# Altium PCB layout.PcbDoc (part 7 of 11)
Units mil, origin at the board's own origin, x right, y up, seen from the top; angles counter-clockwise.
Board outline 3543.31 x 3149.61 mil, 2 copper layers (Top Layer, Bottom Layer); 78 components, 73 nets, 327 pads, 143 vias.
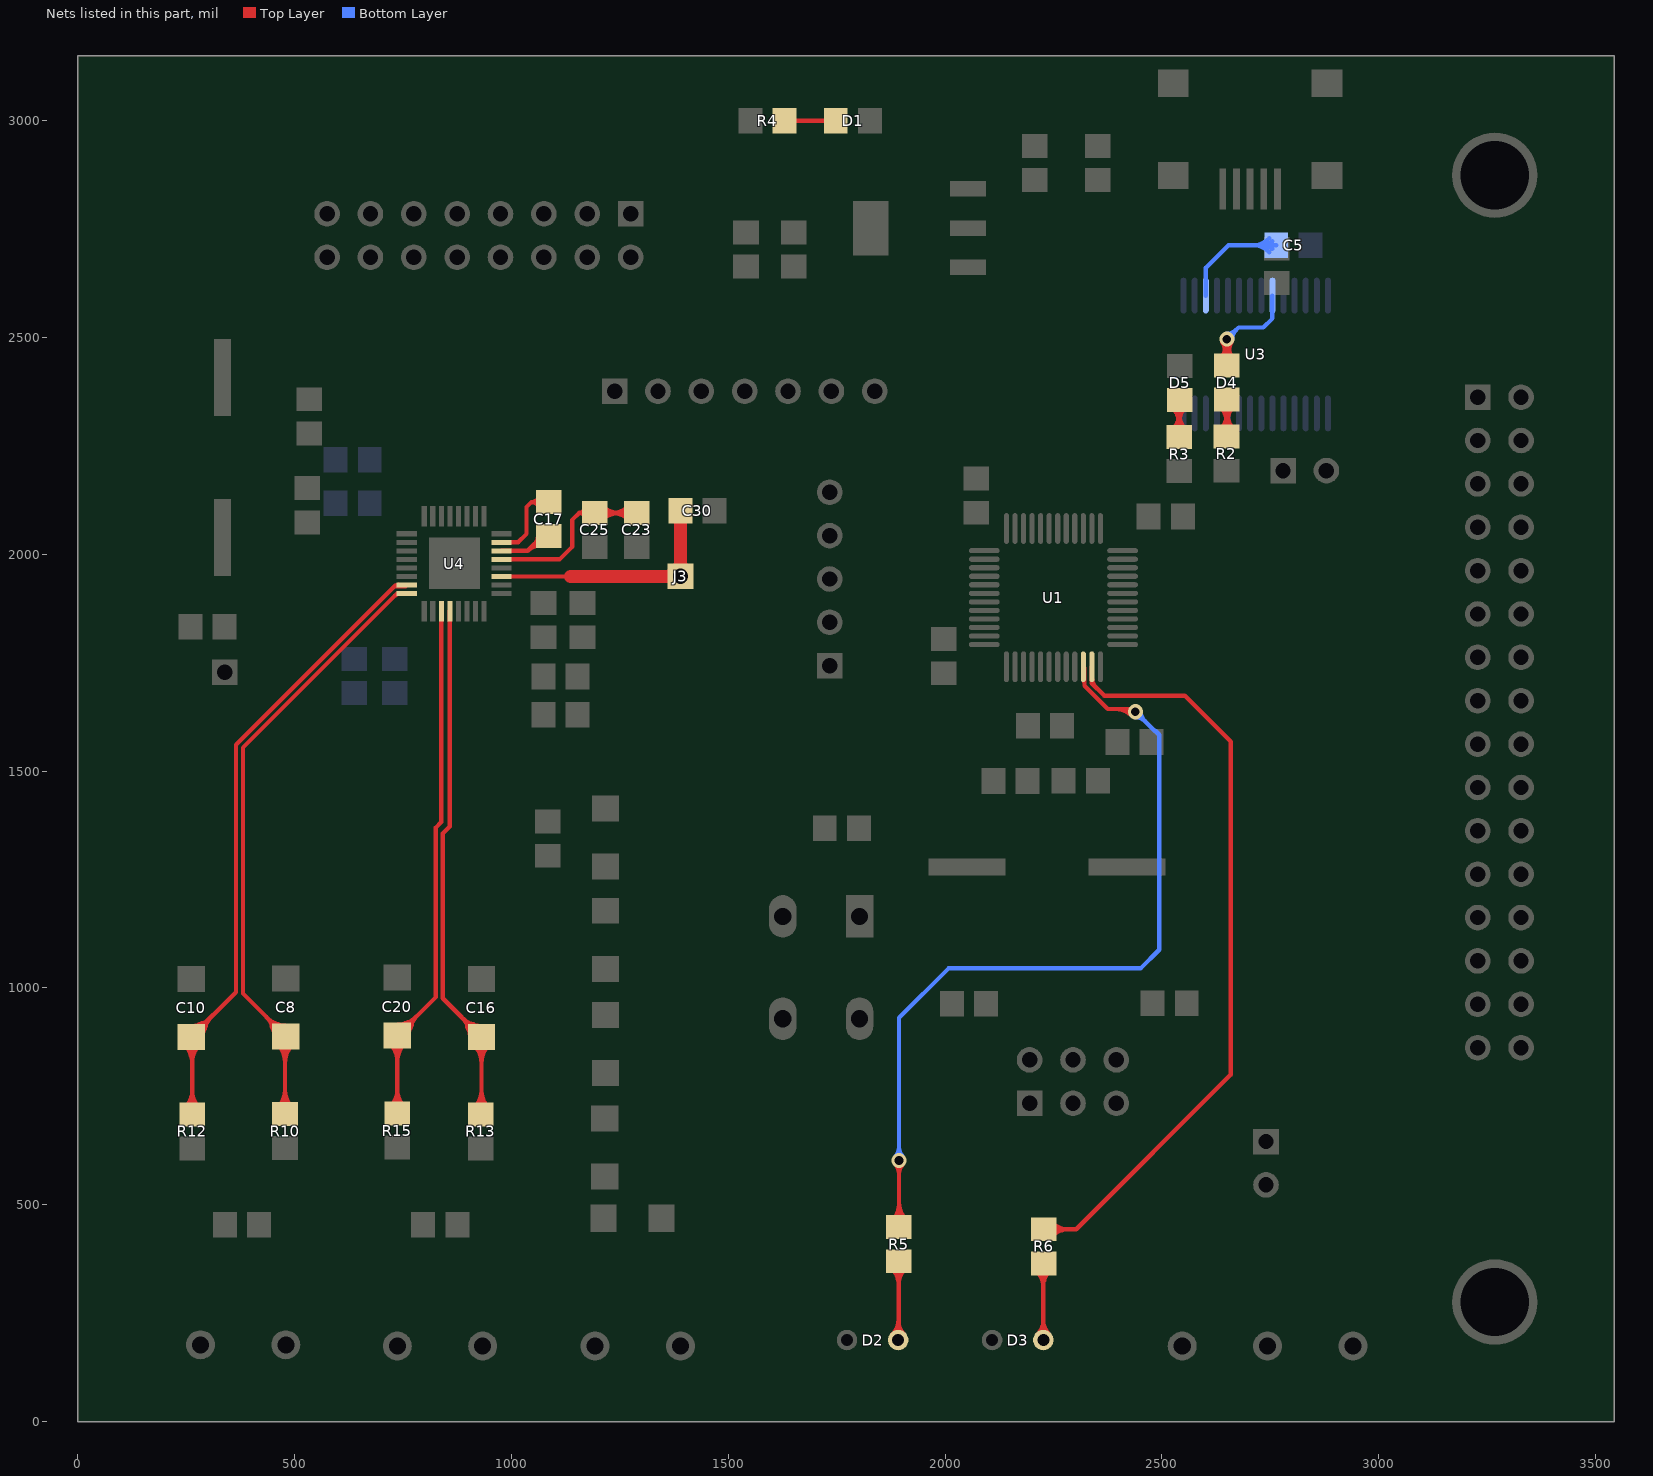
[diagram p7: the nets of this part, all layers, seen from the top]

## Via types
v1: diameter 35, hole 20, Top Layer to Bottom Layer, tented both sides, 113 vias
v2: diameter 35, hole 20, Top Layer to Bottom Layer, 28 vias
v3: diameter 35.43, hole 35.43, Top Layer to Bottom Layer, 2 vias

## Nets (pads, with @x,y where several pads share a name; then routed paths per layer and width w, separated by ;. In a path a pad name is that pad's centre, name@x,y a point inside that pad or via, vN(x,y) a via of type N, cw(c..) or ccw(c..) an arc to the next point about the centre after c; other vN are vias at no path point) (continued)
IAN: C10.2 R12.2 U4.7 | length 4592.9
  Top Layer w10: R12.2@264,708.37 264,885.14 C10.2@262,887.14 365,990.14 365,1560.78 730.55,1926.32 ; U4.7@758.72,1929.1 755.95,1926.32 730.55,1926.32 ; C10.2@245.95,869.52 cw(c202.38,825.95) 264,825.95 ; C10.2@245.95,869.52 cw(c202.38,825.95) 264,825.95 ; C10.2@245.95,869.52 cw(c202.38,825.95) 264,825.95 ; C10.2@245.95,869.52 cw(c202.38,825.95) 264,825.95 ; C10.2@245.95,869.52 cw(c202.38,825.95) 264,825.95 ; R12.2@248.05,724.32 ccw(c209.54,762.83) 264,762.83 ; R12.2@248.05,724.32 ccw(c209.54,762.83) 264,762.83 ; R12.2@248.05,724.32 ccw(c209.54,762.83) 264,762.83 ; R12.2@248.05,724.32 ccw(c209.54,762.83) 264,762.83 ; R12.2@248.05,724.32 ccw(c209.54,762.83) 264,762.83 ; C10.2@253.02,876.59 cw(c226.53,850.09) 264,850.09 ; C10.2@253.02,876.59 cw(c226.53,850.09) 264,850.09 ; C10.2@253.02,876.59 cw(c226.53,850.09) 264,850.09 ; C10.2@253.02,876.59 cw(c226.53,850.09) 264,850.09 ; C10.2@253.02,876.59 cw(c226.53,850.09) 264,850.09 ; R12.2@255.12,717.25 ccw(c233.68,738.69) 264,738.69 ; R12.2@255.12,717.25 ccw(c233.68,738.69) 264,738.69 ; R12.2@255.12,717.25 ccw(c233.68,738.69) 264,738.69 ; R12.2@255.12,717.25 ccw(c233.68,738.69) 264,738.69 ; R12.2@255.12,717.25 ccw(c233.68,738.69) 264,738.69 ; C10.2@258.58,888.05 cw(c296.19,881.23) 286.3,918.15 ; C10.2@258.58,888.05 cw(c296.19,881.23) 286.3,918.15 ; C10.2@258.58,888.05 cw(c296.19,881.23) 286.3,918.15 ; C10.2@258.58,888.05 cw(c296.19,881.23) 286.3,918.15 ; C10.2@258.58,888.05 cw(c296.19,881.23) 286.3,918.15 ; C10.2@258.58,888.05 cw(c296.19,881.23) 286.3,918.15 ; C10.2@258.58,888.05 cw(c296.19,881.23) 286.3,918.15 ; C10.2@258.58,888.05 cw(c296.19,881.23) 286.3,918.15 ; C10.2@258.58,888.05 cw(c296.19,881.23) 286.3,918.15 ; C10.2@258.58,888.05 cw(c296.19,881.23) 286.3,918.15 ; C10.2@263.57,902.06 ccw(c263.57,934.28) C10.2@286.36,911.5 ; C10.2@263.57,902.06 ccw(c263.57,934.28) C10.2@286.36,911.5 ; C10.2@263.57,902.06 ccw(c263.57,934.28) C10.2@286.36,911.5 ; C10.2@263.57,902.06 ccw(c263.57,934.28) C10.2@286.36,911.5 ; C10.2@263.57,902.06 ccw(c263.57,934.28) C10.2@286.36,911.5 ; C10.2@263.57,912.06 ccw(c263.57,968.43) 303.43,928.57 ; C10.2@263.57,912.06 ccw(c263.57,968.43) 303.43,928.57 ; C10.2@263.57,912.06 ccw(c263.57,968.43) 303.43,928.57 ; C10.2@263.57,912.06 ccw(c263.57,968.43) 303.43,928.57 ; C10.2@263.57,912.06 ccw(c263.57,968.43) 303.43,928.57 ; 264,738.69 ccw(c294.32,738.69) R12.2@272.88,717.25 ; 264,738.69 ccw(c294.32,738.69) R12.2@272.88,717.25 ; 264,738.69 ccw(c294.32,738.69) R12.2@272.88,717.25 ; 264,738.69 ccw(c294.32,738.69) R12.2@272.88,717.25 ; 264,738.69 ccw(c294.32,738.69) R12.2@272.88,717.25 ; 264,762.83 ccw(c318.46,762.83) R12.2@279.95,724.32 ; 264,762.83 ccw(c318.46,762.83) R12.2@279.95,724.32 ; 264,762.83 ccw(c318.46,762.83) R12.2@279.95,724.32 ; 264,762.83 ccw(c318.46,762.83) R12.2@279.95,724.32 ; 264,762.83 ccw(c318.46,762.83) R12.2@279.95,724.32 ; 264,828 cw(c322.71,828) C10.2@281.2,869.52 ; 264,828 cw(c322.71,828) C10.2@281.2,869.52 ; 264,828 cw(c322.71,828) C10.2@281.2,869.52 ; 264,828 cw(c322.71,828) C10.2@281.2,869.52 ; 264,828 cw(c322.71,828) C10.2@281.2,869.52 ; 264,852.15 cw(c298.57,852.15) C10.2@274.13,876.59 ; 264,852.15 cw(c298.57,852.15) C10.2@274.13,876.59 ; 264,852.15 cw(c298.57,852.15) C10.2@274.13,876.59 ; 264,852.15 cw(c298.57,852.15) C10.2@274.13,876.59 ; 264,852.15 cw(c298.57,852.15) C10.2@274.13,876.59 ; C10.2@264.7,882.19 ccw(c255.67,921.87) 294.98,911.34 ; C10.2@264.7,882.19 ccw(c255.67,921.87) 294.98,911.34 ; C10.2@264.7,882.19 ccw(c255.67,921.87) 294.98,911.34 ; C10.2@264.7,882.19 ccw(c255.67,921.87) 294.98,911.34 ; C10.2@264.7,882.19 ccw(c255.67,921.87) 294.98,911.34 ; C10.2@264.7,882.19 ccw(c255.67,921.87) 294.98,911.34 ; C10.2@264.7,882.19 ccw(c255.67,921.87) 294.98,911.34 ; C10.2@264.7,882.19 ccw(c255.67,921.87) 294.98,911.34 ; C10.2@264.7,882.19 ccw(c255.67,921.87) 294.98,911.34 ; C10.2@264.7,882.19 ccw(c255.67,921.87) 294.98,911.34 ; C10.2@278.5,887.14 cw(c318.32,887.14) C10.2@290.16,915.3 ; C10.2@278.5,887.14 cw(c318.32,887.14) C10.2@290.16,915.3 ; C10.2@278.5,887.14 cw(c318.32,887.14) C10.2@290.16,915.3 ; C10.2@278.5,887.14 cw(c318.32,887.14) C10.2@290.16,915.3 ; C10.2@278.5,887.14 cw(c318.32,887.14) C10.2@290.16,915.3 ; C10.2@288.5,887.14 cw(c352.46,887.14) 307.23,932.37 ; C10.2@288.5,887.14 cw(c352.46,887.14) 307.23,932.37 ; C10.2@288.5,887.14 cw(c352.46,887.14) 307.23,932.37 ; C10.2@288.5,887.14 cw(c352.46,887.14) 307.23,932.37 ; C10.2@288.5,887.14 cw(c352.46,887.14) 307.23,932.37 ; 730.55,1926.32 cw(c737.04,1919.83) U4.7@740.65,1928.27 ; 730.55,1926.32 cw(c737.04,1919.83) U4.7@740.65,1928.27 ; 730.55,1926.32 cw(c737.04,1919.83) U4.7@740.65,1928.27 ; 730.55,1926.32 cw(c737.04,1919.83) U4.7@740.65,1928.27 ; 730.55,1926.32 cw(c737.04,1919.83) U4.7@740.65,1928.27 ; 732.11,1926.32 ccw(c732.11,1938) U4.7@740.37,1929.74 ; 732.11,1926.32 ccw(c732.11,1938) U4.7@740.37,1929.74 ; 732.11,1926.32 ccw(c732.11,1938) U4.7@740.37,1929.74 ; 732.11,1926.32 ccw(c732.11,1938) U4.7@740.37,1929.74 ; 732.11,1926.32 ccw(c732.11,1938) U4.7@740.37,1929.74
IAP: C8.1 R10.2 U4.8 | length 4515.3
  Top Layer w10: R10.2@478,709.37 478,886 C8.1@480,888 381,987 381,1554.15 736.27,1909.42 U4.8@758.72,1909.42 ; 434.77,933.23 cw(c389.54,888) C8.1@453.5,888 ; 434.77,933.23 cw(c389.54,888) C8.1@453.5,888 ; 434.77,933.23 cw(c389.54,888) C8.1@453.5,888 ; 434.77,933.23 cw(c389.54,888) C8.1@453.5,888 ; 434.77,933.23 cw(c389.54,888) C8.1@453.5,888 ; 438.57,929.43 ccw(c478.43,969.28) C8.1@478.43,912.92 ; 438.57,929.43 ccw(c478.43,969.28) C8.1@478.43,912.92 ; 438.57,929.43 ccw(c478.43,969.28) C8.1@478.43,912.92 ; 438.57,929.43 ccw(c478.43,969.28) C8.1@478.43,912.92 ; 438.57,929.43 ccw(c478.43,969.28) C8.1@478.43,912.92 ; 447.02,912.2 ccw(c486.33,922.73) C8.1@477.3,883.05 ; 447.02,912.2 ccw(c486.33,922.73) C8.1@477.3,883.05 ; 447.02,912.2 ccw(c486.33,922.73) C8.1@477.3,883.05 ; 447.02,912.2 ccw(c486.33,922.73) C8.1@477.3,883.05 ; 447.02,912.2 ccw(c486.33,922.73) C8.1@477.3,883.05 ; 447.02,912.2 ccw(c486.33,922.73) C8.1@477.3,883.05 ; 447.02,912.2 ccw(c486.33,922.73) C8.1@477.3,883.05 ; 447.02,912.2 ccw(c486.33,922.73) C8.1@477.3,883.05 ; 447.02,912.2 ccw(c486.33,922.73) C8.1@477.3,883.05 ; 447.02,912.2 ccw(c486.33,922.73) C8.1@477.3,883.05 ; C8.1@451.84,916.16 cw(c423.68,888) C8.1@463.5,888 ; C8.1@451.84,916.16 cw(c423.68,888) C8.1@463.5,888 ; C8.1@451.84,916.16 cw(c423.68,888) C8.1@463.5,888 ; C8.1@451.84,916.16 cw(c423.68,888) C8.1@463.5,888 ; C8.1@451.84,916.16 cw(c423.68,888) C8.1@463.5,888 ; C8.1@455.64,912.36 ccw(c478.43,935.14) C8.1@478.43,902.92 ; C8.1@455.64,912.36 ccw(c478.43,935.14) C8.1@478.43,902.92 ; C8.1@455.64,912.36 ccw(c478.43,935.14) C8.1@478.43,902.92 ; C8.1@455.64,912.36 ccw(c478.43,935.14) C8.1@478.43,902.92 ; C8.1@455.64,912.36 ccw(c478.43,935.14) C8.1@478.43,902.92 ; 455.7,919.01 cw(c445.81,882.09) C8.1@483.42,888.91 ; 455.7,919.01 cw(c445.81,882.09) C8.1@483.42,888.91 ; 455.7,919.01 cw(c445.81,882.09) C8.1@483.42,888.91 ; 455.7,919.01 cw(c445.81,882.09) C8.1@483.42,888.91 ; 455.7,919.01 cw(c445.81,882.09) C8.1@483.42,888.91 ; 455.7,919.01 cw(c445.81,882.09) C8.1@483.42,888.91 ; 455.7,919.01 cw(c445.81,882.09) C8.1@483.42,888.91 ; 455.7,919.01 cw(c445.81,882.09) C8.1@483.42,888.91 ; 455.7,919.01 cw(c445.81,882.09) C8.1@483.42,888.91 ; 455.7,919.01 cw(c445.81,882.09) C8.1@483.42,888.91 ; C8.1@460.8,870.38 cw(c419.29,828.86) 478,828.86 ; C8.1@460.8,870.38 cw(c419.29,828.86) 478,828.86 ; C8.1@460.8,870.38 cw(c419.29,828.86) 478,828.86 ; C8.1@460.8,870.38 cw(c419.29,828.86) 478,828.86 ; C8.1@460.8,870.38 cw(c419.29,828.86) 478,828.86 ; R10.2@462.05,725.32 ccw(c423.54,763.83) 478,763.83 ; R10.2@462.05,725.32 ccw(c423.54,763.83) 478,763.83 ; R10.2@462.05,725.32 ccw(c423.54,763.83) 478,763.83 ; R10.2@462.05,725.32 ccw(c423.54,763.83) 478,763.83 ; R10.2@462.05,725.32 ccw(c423.54,763.83) 478,763.83 ; C8.1@467.87,877.45 cw(c443.43,853) 478,853 ; C8.1@467.87,877.45 cw(c443.43,853) 478,853 ; C8.1@467.87,877.45 cw(c443.43,853) 478,853 ; C8.1@467.87,877.45 cw(c443.43,853) 478,853 ; C8.1@467.87,877.45 cw(c443.43,853) 478,853 ; R10.2@469.12,718.25 ccw(c447.68,739.69) 478,739.69 ; R10.2@469.12,718.25 ccw(c447.68,739.69) 478,739.69 ; R10.2@469.12,718.25 ccw(c447.68,739.69) 478,739.69 ; R10.2@469.12,718.25 ccw(c447.68,739.69) 478,739.69 ; R10.2@469.12,718.25 ccw(c447.68,739.69) 478,739.69 ; 478,739.69 ccw(c508.32,739.69) R10.2@486.88,718.25 ; 478,739.69 ccw(c508.32,739.69) R10.2@486.88,718.25 ; 478,739.69 ccw(c508.32,739.69) R10.2@486.88,718.25 ; 478,739.69 ccw(c508.32,739.69) R10.2@486.88,718.25 ; 478,739.69 ccw(c508.32,739.69) R10.2@486.88,718.25 ; 478,763.83 ccw(c532.46,763.83) R10.2@493.95,725.32 ; 478,763.83 ccw(c532.46,763.83) R10.2@493.95,725.32 ; 478,763.83 ccw(c532.46,763.83) R10.2@493.95,725.32 ; 478,763.83 ccw(c532.46,763.83) R10.2@493.95,725.32 ; 478,763.83 ccw(c532.46,763.83) R10.2@493.95,725.32 ; 478,826.81 cw(c539.62,826.81) C8.1@496.05,870.38 ; 478,826.81 cw(c539.62,826.81) C8.1@496.05,870.38 ; 478,826.81 cw(c539.62,826.81) C8.1@496.05,870.38 ; 478,826.81 cw(c539.62,826.81) C8.1@496.05,870.38 ; 478,826.81 cw(c539.62,826.81) C8.1@496.05,870.38 ; 478,850.95 cw(c515.47,850.95) C8.1@488.98,877.45 ; 478,850.95 cw(c515.47,850.95) C8.1@488.98,877.45 ; 478,850.95 cw(c515.47,850.95) C8.1@488.98,877.45 ; 478,850.95 cw(c515.47,850.95) C8.1@488.98,877.45 ; 478,850.95 cw(c515.47,850.95) C8.1@488.98,877.45 ; 731.37,1904.52 cw(c741.01,1894.88) U4.8@741.01,1908.51 ; 731.37,1904.52 cw(c741.01,1894.88) U4.8@741.01,1908.51 ; 731.37,1904.52 cw(c741.01,1894.88) U4.8@741.01,1908.51 ; 731.37,1904.52 cw(c741.01,1894.88) U4.8@741.01,1908.51 ; 731.37,1904.52 cw(c741.01,1894.88) U4.8@741.01,1908.51
IBMS: C30.1 J3.1 U4.19 | length 1353.1
  Top Layer w10: U4.19@977.23,1948.79 1136,1948.79
  Top Layer w30: 1136,1948.79 1389.79,1948.79 J3.1@1390,1949 1390,2099.63 C30.1@1389.63,2100 ; 1354.42,1948.79 ccw(c1354.42,1984.58) J3.1@1379.73,1959.27 ; 1354.42,1948.79 ccw(c1354.42,1984.58) J3.1@1379.73,1959.27 ; 1354.42,1948.79 ccw(c1354.42,1984.58) J3.1@1379.73,1959.27 ; 1354.42,1948.79 ccw(c1354.42,1984.58) J3.1@1379.73,1959.27 ; 1354.42,1948.79 ccw(c1354.42,1984.58) J3.1@1379.73,1959.27 ; 1355.44,1948.79 cw(c1355.44,1914.44) J3.1@1379.73,1938.73 ; 1355.44,1948.79 cw(c1355.44,1914.44) J3.1@1379.73,1938.73 ; 1355.44,1948.79 cw(c1355.44,1914.44) J3.1@1379.73,1938.73 ; 1355.44,1948.79 cw(c1355.44,1914.44) J3.1@1379.73,1938.73 ; 1355.44,1948.79 cw(c1355.44,1914.44) J3.1@1379.73,1938.73 ; J3.1@1379.73,1959.27 ccw(c1354.93,1984.07) 1390,1984.07 ; J3.1@1379.73,1959.27 ccw(c1354.93,1984.07) 1390,1984.07 ; J3.1@1379.73,1959.27 ccw(c1354.93,1984.07) 1390,1984.07 ; J3.1@1379.73,1959.27 ccw(c1354.93,1984.07) 1390,1984.07 ; J3.1@1379.73,1959.27 ccw(c1354.93,1984.07) 1390,1984.07 ; C30.1@1380.75,2089.15 cw(c1358.42,2066.82) 1390,2066.82 ; C30.1@1380.75,2089.15 cw(c1358.42,2066.82) 1390,2066.82 ; C30.1@1380.75,2089.15 cw(c1358.42,2066.82) 1390,2066.82 ; C30.1@1380.75,2089.15 cw(c1358.42,2066.82) 1390,2066.82 ; C30.1@1380.75,2089.15 cw(c1358.42,2066.82) 1390,2066.82 ; 1390,1984.07 ccw(c1425.07,1984.07) J3.1@1400.27,1959.27 ; 1390,1984.07 ccw(c1425.07,1984.07) J3.1@1400.27,1959.27 ; 1390,1984.07 ccw(c1425.07,1984.07) J3.1@1400.27,1959.27 ; 1390,1984.07 ccw(c1425.07,1984.07) J3.1@1400.27,1959.27 ; 1390,1984.07 ccw(c1425.07,1984.07) J3.1@1400.27,1959.27 ; 1390,2068.6 cw(c1419.06,2068.6) C30.1@1398.51,2089.15 ; 1390,2068.6 cw(c1419.06,2068.6) C30.1@1398.51,2089.15 ; 1390,2068.6 cw(c1419.06,2068.6) C30.1@1398.51,2089.15 ; 1390,2068.6 cw(c1419.06,2068.6) C30.1@1398.51,2089.15 ; 1390,2068.6 cw(c1419.06,2068.6) C30.1@1398.51,2089.15
IBN: C20.2 R15.2 U4.11 | length 4251
  Top Layer w10: R15.2@737,710.37 C20.2@737,890.14 826,979.14 826,1370 838.45,1382.45 U4.11@838.45,1869.06 ; C20.2@719.38,872.52 cw(c676.83,829.98) 737,829.98 ; C20.2@719.38,872.52 cw(c676.83,829.98) 737,829.98 ; C20.2@719.38,872.52 cw(c676.83,829.98) 737,829.98 ; C20.2@719.38,872.52 cw(c676.83,829.98) 737,829.98 ; C20.2@719.38,872.52 cw(c676.83,829.98) 737,829.98 ; R15.2@721.05,726.32 ccw(c682.54,764.83) 737,764.83 ; R15.2@721.05,726.32 ccw(c682.54,764.83) 737,764.83 ; R15.2@721.05,726.32 ccw(c682.54,764.83) 737,764.83 ; R15.2@721.05,726.32 ccw(c682.54,764.83) 737,764.83 ; R15.2@721.05,726.32 ccw(c682.54,764.83) 737,764.83 ; C20.2@726.45,879.59 cw(c700.98,854.12) 737,854.12 ; C20.2@726.45,879.59 cw(c700.98,854.12) 737,854.12 ; C20.2@726.45,879.59 cw(c700.98,854.12) 737,854.12 ; C20.2@726.45,879.59 cw(c700.98,854.12) 737,854.12 ; C20.2@726.45,879.59 cw(c700.98,854.12) 737,854.12 ; R15.2@728.12,719.25 ccw(c706.68,740.69) 737,740.69 ; R15.2@728.12,719.25 ccw(c706.68,740.69) 737,740.69 ; R15.2@728.12,719.25 ccw(c706.68,740.69) 737,740.69 ; R15.2@728.12,719.25 ccw(c706.68,740.69) 737,740.69 ; R15.2@728.12,719.25 ccw(c706.68,740.69) 737,740.69 ; C20.2@733.58,891.05 cw(c771.19,884.23) 761.3,921.15 ; C20.2@733.58,891.05 cw(c771.19,884.23) 761.3,921.15 ; C20.2@733.58,891.05 cw(c771.19,884.23) 761.3,921.15 ; C20.2@733.58,891.05 cw(c771.19,884.23) 761.3,921.15 ; C20.2@733.58,891.05 cw(c771.19,884.23) 761.3,921.15 ; C20.2@733.58,891.05 cw(c771.19,884.23) 761.3,921.15 ; C20.2@733.58,891.05 cw(c771.19,884.23) 761.3,921.15 ; C20.2@733.58,891.05 cw(c771.19,884.23) 761.3,921.15 ; C20.2@733.58,891.05 cw(c771.19,884.23) 761.3,921.15 ; C20.2@733.58,891.05 cw(c771.19,884.23) 761.3,921.15 ; 737,740.69 ccw(c767.32,740.69) R15.2@745.88,719.25 ; 737,740.69 ccw(c767.32,740.69) R15.2@745.88,719.25 ; 737,740.69 ccw(c767.32,740.69) R15.2@745.88,719.25 ; 737,740.69 ccw(c767.32,740.69) R15.2@745.88,719.25 ; 737,740.69 ccw(c767.32,740.69) R15.2@745.88,719.25 ; 737,764.83 ccw(c791.46,764.83) R15.2@752.95,726.32 ; 737,764.83 ccw(c791.46,764.83) R15.2@752.95,726.32 ; 737,764.83 ccw(c791.46,764.83) R15.2@752.95,726.32 ; 737,764.83 ccw(c791.46,764.83) R15.2@752.95,726.32 ; 737,764.83 ccw(c791.46,764.83) R15.2@752.95,726.32 ; 737,829.98 cw(c797.17,829.98) C20.2@754.62,872.52 ; 737,829.98 cw(c797.17,829.98) C20.2@754.62,872.52 ; 737,829.98 cw(c797.17,829.98) C20.2@754.62,872.52 ; 737,829.98 cw(c797.17,829.98) C20.2@754.62,872.52 ; 737,829.98 cw(c797.17,829.98) C20.2@754.62,872.52 ; 737,854.12 cw(c773.02,854.12) C20.2@747.55,879.59 ; 737,854.12 cw(c773.02,854.12) C20.2@747.55,879.59 ; 737,854.12 cw(c773.02,854.12) C20.2@747.55,879.59 ; 737,854.12 cw(c773.02,854.12) C20.2@747.55,879.59 ; 737,854.12 cw(c773.02,854.12) C20.2@747.55,879.59 ; C20.2@738.57,905.06 ccw(c738.57,937.28) C20.2@761.36,914.5 ; C20.2@738.57,905.06 ccw(c738.57,937.28) C20.2@761.36,914.5 ; C20.2@738.57,905.06 ccw(c738.57,937.28) C20.2@761.36,914.5 ; C20.2@738.57,905.06 ccw(c738.57,937.28) C20.2@761.36,914.5 ; C20.2@738.57,905.06 ccw(c738.57,937.28) C20.2@761.36,914.5 ; C20.2@738.57,915.06 ccw(c738.57,971.43) 778.43,931.57 ; C20.2@738.57,915.06 ccw(c738.57,971.43) 778.43,931.57 ; C20.2@738.57,915.06 ccw(c738.57,971.43) 778.43,931.57 ; C20.2@738.57,915.06 ccw(c738.57,971.43) 778.43,931.57 ; C20.2@738.57,915.06 ccw(c738.57,971.43) 778.43,931.57 ; C20.2@739.7,885.19 ccw(c730.67,924.87) 769.98,914.34 ; C20.2@739.7,885.19 ccw(c730.67,924.87) 769.98,914.34 ; C20.2@739.7,885.19 ccw(c730.67,924.87) 769.98,914.34 ; C20.2@739.7,885.19 ccw(c730.67,924.87) 769.98,914.34 ; C20.2@739.7,885.19 ccw(c730.67,924.87) 769.98,914.34 ; C20.2@739.7,885.19 ccw(c730.67,924.87) 769.98,914.34 ; C20.2@739.7,885.19 ccw(c730.67,924.87) 769.98,914.34 ; C20.2@739.7,885.19 ccw(c730.67,924.87) 769.98,914.34 ; C20.2@739.7,885.19 ccw(c730.67,924.87) 769.98,914.34 ; C20.2@739.7,885.19 ccw(c730.67,924.87) 769.98,914.34 ; C20.2@753.5,890.14 cw(c793.32,890.14) C20.2@765.16,918.3 ; C20.2@753.5,890.14 cw(c793.32,890.14) C20.2@765.16,918.3 ; C20.2@753.5,890.14 cw(c793.32,890.14) C20.2@765.16,918.3 ; C20.2@753.5,890.14 cw(c793.32,890.14) C20.2@765.16,918.3 ; C20.2@753.5,890.14 cw(c793.32,890.14) C20.2@765.16,918.3 ; C20.2@763.5,890.14 cw(c827.46,890.14) 782.23,935.37 ; C20.2@763.5,890.14 cw(c827.46,890.14) 782.23,935.37 ; C20.2@763.5,890.14 cw(c827.46,890.14) 782.23,935.37 ; C20.2@763.5,890.14 cw(c827.46,890.14) 782.23,935.37 ; C20.2@763.5,890.14 cw(c827.46,890.14) 782.23,935.37
IBP: C16.1 R13.2 U4.12 | length 4255.3
  Top Layer w10: U4.12@858.13,1869.06 858.13,1372.13 842,1356 842,976 C16.1@931,887 931,710.37 R13.2@929,708.37 ; 885.77,932.23 cw(c840.54,887) C16.1@904.5,887 ; 885.77,932.23 cw(c840.54,887) C16.1@904.5,887 ; 885.77,932.23 cw(c840.54,887) C16.1@904.5,887 ; 885.77,932.23 cw(c840.54,887) C16.1@904.5,887 ; 885.77,932.23 cw(c840.54,887) C16.1@904.5,887 ; 889.57,928.43 ccw(c929.43,968.28) C16.1@929.43,911.92 ; 889.57,928.43 ccw(c929.43,968.28) C16.1@929.43,911.92 ; 889.57,928.43 ccw(c929.43,968.28) C16.1@929.43,911.92 ; 889.57,928.43 ccw(c929.43,968.28) C16.1@929.43,911.92 ; 889.57,928.43 ccw(c929.43,968.28) C16.1@929.43,911.92 ; 898.02,911.2 ccw(c937.33,921.73) C16.1@928.3,882.05 ; 898.02,911.2 ccw(c937.33,921.73) C16.1@928.3,882.05 ; 898.02,911.2 ccw(c937.33,921.73) C16.1@928.3,882.05 ; 898.02,911.2 ccw(c937.33,921.73) C16.1@928.3,882.05 ; 898.02,911.2 ccw(c937.33,921.73) C16.1@928.3,882.05 ; 898.02,911.2 ccw(c937.33,921.73) C16.1@928.3,882.05 ; 898.02,911.2 ccw(c937.33,921.73) C16.1@928.3,882.05 ; 898.02,911.2 ccw(c937.33,921.73) C16.1@928.3,882.05 ; 898.02,911.2 ccw(c937.33,921.73) C16.1@928.3,882.05 ; 898.02,911.2 ccw(c937.33,921.73) C16.1@928.3,882.05 ; C16.1@902.84,915.16 cw(c874.68,887) C16.1@914.5,887 ; C16.1@902.84,915.16 cw(c874.68,887) C16.1@914.5,887 ; C16.1@902.84,915.16 cw(c874.68,887) C16.1@914.5,887 ; C16.1@902.84,915.16 cw(c874.68,887) C16.1@914.5,887 ; C16.1@902.84,915.16 cw(c874.68,887) C16.1@914.5,887 ; C16.1@906.64,911.36 ccw(c929.43,934.14) C16.1@929.43,901.92 ; C16.1@906.64,911.36 ccw(c929.43,934.14) C16.1@929.43,901.92 ; C16.1@906.64,911.36 ccw(c929.43,934.14) C16.1@929.43,901.92 ; C16.1@906.64,911.36 ccw(c929.43,934.14) C16.1@929.43,901.92 ; C16.1@906.64,911.36 ccw(c929.43,934.14) C16.1@929.43,901.92 ; 906.7,918.01 cw(c896.81,881.09) C16.1@934.42,887.91 ; 906.7,918.01 cw(c896.81,881.09) C16.1@934.42,887.91 ; 906.7,918.01 cw(c896.81,881.09) C16.1@934.42,887.91 ; 906.7,918.01 cw(c896.81,881.09) C16.1@934.42,887.91 ; 906.7,918.01 cw(c896.81,881.09) C16.1@934.42,887.91 ; 906.7,918.01 cw(c896.81,881.09) C16.1@934.42,887.91 ; 906.7,918.01 cw(c896.81,881.09) C16.1@934.42,887.91 ; 906.7,918.01 cw(c896.81,881.09) C16.1@934.42,887.91 ; 906.7,918.01 cw(c896.81,881.09) C16.1@934.42,887.91 ; 906.7,918.01 cw(c896.81,881.09) C16.1@934.42,887.91 ; C16.1@913.38,869.38 cw(c870.83,826.83) 931,826.83 ; C16.1@913.38,869.38 cw(c870.83,826.83) 931,826.83 ; C16.1@913.38,869.38 cw(c870.83,826.83) 931,826.83 ; C16.1@913.38,869.38 cw(c870.83,826.83) 931,826.83 ; C16.1@913.38,869.38 cw(c870.83,826.83) 931,826.83 ; R13.2@915.02,724.32 ccw(c876.43,762.91) 931,762.91 ; R13.2@915.02,724.32 ccw(c876.43,762.91) 931,762.91 ; R13.2@915.02,724.32 ccw(c876.43,762.91) 931,762.91 ; R13.2@915.02,724.32 ccw(c876.43,762.91) 931,762.91 ; R13.2@915.02,724.32 ccw(c876.43,762.91) 931,762.91 ; C16.1@920.45,876.45 cw(c894.98,850.98) 931,850.98 ; C16.1@920.45,876.45 cw(c894.98,850.98) 931,850.98 ; C16.1@920.45,876.45 cw(c894.98,850.98) 931,850.98 ; C16.1@920.45,876.45 cw(c894.98,850.98) 931,850.98 ; C16.1@920.45,876.45 cw(c894.98,850.98) 931,850.98 ; R13.2@922.09,717.25 ccw(c900.57,738.77) 931,738.77 ; R13.2@922.09,717.25 ccw(c900.57,738.77) 931,738.77 ; R13.2@922.09,717.25 ccw(c900.57,738.77) 931,738.77 ; R13.2@922.09,717.25 ccw(c900.57,738.77) 931,738.77 ; R13.2@922.09,717.25 ccw(c900.57,738.77) 931,738.77 ; 931,738.61 ccw(c961.21,738.61) R13.2@939.85,717.25 ; 931,738.61 ccw(c961.21,738.61) R13.2@939.85,717.25 ; 931,738.61 ccw(c961.21,738.61) R13.2@939.85,717.25 ; 931,738.61 ccw(c961.21,738.61) R13.2@939.85,717.25 ; 931,738.61 ccw(c961.21,738.61) R13.2@939.85,717.25 ; 931,762.76 ccw(c985.35,762.76) R13.2@946.92,724.32 ; 931,762.76 ccw(c985.35,762.76) R13.2@946.92,724.32 ; 931,762.76 ccw(c985.35,762.76) R13.2@946.92,724.32 ; 931,762.76 ccw(c985.35,762.76) R13.2@946.92,724.32 ; 931,762.76 ccw(c985.35,762.76) R13.2@946.92,724.32 ; 931,826.83 cw(c991.17,826.83) C16.1@948.62,869.38 ; 931,826.83 cw(c991.17,826.83) C16.1@948.62,869.38 ; 931,826.83 cw(c991.17,826.83) C16.1@948.62,869.38 ; 931,826.83 cw(c991.17,826.83) C16.1@948.62,869.38 ; 931,826.83 cw(c991.17,826.83) C16.1@948.62,869.38 ; 931,850.98 cw(c967.02,850.98) C16.1@941.55,876.45 ; 931,850.98 cw(c967.02,850.98) C16.1@941.55,876.45 ; 931,850.98 cw(c967.02,850.98) C16.1@941.55,876.45 ; 931,850.98 cw(c967.02,850.98) C16.1@941.55,876.45 ; 931,850.98 cw(c967.02,850.98) C16.1@941.55,876.45
LED0: R5.1 U1.10 | length 3645.9
  Top Layer w10: R5.1@1893,448.37 1894,449.37 v2(1894,602) ; U1.10@2318.9,1740.55 2321.68,1737.77 2321.68,1696.7 2375.37,1643 2433,1643 v2(2439,1637) v2@2451,1637 ; R5.1@1879.02,464.32 ccw(c1842.84,500.49) 1894,500.49 ; R5.1@1879.02,464.32 ccw(c1842.84,500.49) 1894,500.49 ; R5.1@1879.02,464.32 ccw(c1842.84,500.49) 1894,500.49 ; R5.1@1879.02,464.32 ccw(c1842.84,500.49) 1894,500.49 ; R5.1@1879.02,464.32 ccw(c1842.84,500.49) 1894,500.49 ; v2@1885.16,593.16 cw(c1863.82,571.82) 1894,571.82 ; v2@1885.16,593.16 cw(c1863.82,571.82) 1894,571.82 ; v2@1885.16,593.16 cw(c1863.82,571.82) 1894,571.82 ; v2@1885.16,593.16 cw(c1863.82,571.82) 1894,571.82 ; v2@1885.16,593.16 cw(c1863.82,571.82) 1894,571.82 ; R5.1@1886.09,457.25 ccw(c1866.99,476.35) 1894,476.35 ; R5.1@1886.09,457.25 ccw(c1866.99,476.35) 1894,476.35 ; R5.1@1886.09,457.25 ccw(c1866.99,476.35) 1894,476.35 ; R5.1@1886.09,457.25 ccw(c1866.99,476.35) 1894,476.35 ; R5.1@1886.09,457.25 ccw(c1866.99,476.35) 1894,476.35 ; 1894,481.03 ccw(c1927.63,481.03) R5.1@1903.85,457.25 ; 1894,481.03 ccw(c1927.63,481.03) R5.1@1903.85,457.25 ; 1894,481.03 ccw(c1927.63,481.03) R5.1@1903.85,457.25 ; 1894,481.03 ccw(c1927.63,481.03) R5.1@1903.85,457.25 ; 1894,481.03 ccw(c1927.63,481.03) R5.1@1903.85,457.25 ; 1894,505.17 ccw(c1951.77,505.17) R5.1@1910.92,464.32 ; 1894,505.17 ccw(c1951.77,505.17) R5.1@1910.92,464.32 ; 1894,505.17 ccw(c1951.77,505.17) R5.1@1910.92,464.32 ; 1894,505.17 ccw(c1951.77,505.17) R5.1@1910.92,464.32 ; 1894,505.17 ccw(c1951.77,505.17) R5.1@1910.92,464.32 ; 1894,571.82 cw(c1924.18,571.82) v2@1902.84,593.16 ; 1894,571.82 cw(c1924.18,571.82) v2@1902.84,593.16 ; 1894,571.82 cw(c1924.18,571.82) v2@1902.84,593.16 ; 1894,571.82 cw(c1924.18,571.82) v2@1902.84,593.16 ; 1894,571.82 cw(c1924.18,571.82) v2@1902.84,593.16 ; U1.10@2318.26,1710.38 cw(c2310,1702.13) 2321.68,1702.13 ; U1.10@2318.26,1710.38 cw(c2310,1702.13) 2321.68,1702.13 ; U1.10@2318.26,1710.38 cw(c2310,1702.13) 2321.68,1702.13 ; U1.10@2318.26,1710.38 cw(c2310,1702.13) 2321.68,1702.13 ; U1.10@2318.26,1710.38 cw(c2310,1702.13) 2321.68,1702.13 ; 2394.34,1643 cw(c2394.34,1592.34) v2@2430.16,1628.16 ; 2394.34,1643 cw(c2394.34,1592.34) v2@2430.16,1628.16 ; 2394.34,1643 cw(c2394.34,1592.34) v2@2430.16,1628.16 ; 2394.34,1643 cw(c2394.34,1592.34) v2@2430.16,1628.16 ; 2394.34,1643 cw(c2394.34,1592.34) v2@2430.16,1628.16 ; 2418.48,1643 cw(c2418.48,1616.48) v2@2437.23,1635.23 ; 2418.48,1643 cw(c2418.48,1616.48) v2@2437.23,1635.23 ; 2418.48,1643 cw(c2418.48,1616.48) v2@2437.23,1635.23 ; 2418.48,1643 cw(c2418.48,1616.48) v2@2437.23,1635.23 ; 2418.48,1643 cw(c2418.48,1616.48) v2@2437.23,1635.23
  Bottom Layer w10: v2(1894,602) 1894,931 2008,1045 2451,1045 2494,1088 2494,1584 2485,1593 2483,1593 v2(2439,1637) ; v2@1885.16,610.84 ccw(c1863.82,632.18) 1894,632.18 ; v2@1885.16,610.84 ccw(c1863.82,632.18) 1894,632.18 ; v2@1885.16,610.84 ccw(c1863.82,632.18) 1894,632.18 ; v2@1885.16,610.84 ccw(c1863.82,632.18) 1894,632.18 ; v2@1885.16,610.84 ccw(c1863.82,632.18) 1894,632.18 ; 1894,632.18 ccw(c1924.18,632.18) v2@1902.84,610.84 ; 1894,632.18 ccw(c1924.18,632.18) v2@1902.84,610.84 ; 1894,632.18 ccw(c1924.18,632.18) v2@1902.84,610.84 ; 1894,632.18 ccw(c1924.18,632.18) v2@1902.84,610.84 ; 1894,632.18 ccw(c1924.18,632.18) v2@1902.84,610.84 ; v2@2439,1624.5 cw(c2439,1594.32) 2460.34,1615.66 ; v2@2439,1624.5 cw(c2439,1594.32) 2460.34,1615.66 ; v2@2439,1624.5 cw(c2439,1594.32) 2460.34,1615.66 ; v2@2439,1624.5 cw(c2439,1594.32) 2460.34,1615.66 ; v2@2439,1624.5 cw(c2439,1594.32) 2460.34,1615.66 ; v2@2451.5,1637 ccw(c2481.68,1637) 2460.34,1615.66 ; v2@2451.5,1637 ccw(c2481.68,1637) 2460.34,1615.66 ; v2@2451.5,1637 ccw(c2481.68,1637) 2460.34,1615.66 ; v2@2451.5,1637 ccw(c2481.68,1637) 2460.34,1615.66 ; v2@2451.5,1637 ccw(c2481.68,1637) 2460.34,1615.66
LED1: R6.1 U1.11 | length 2517
  Top Layer w10: R6.1@2228,443.37 2302.37,443.37 2659,800 2659,1568 2553,1674 2367,1674 2338.58,1702.42 U1.11@2338.58,1740.55 ; R6.1@2238.85,434.49 cw(c2260.29,413.05) 2260.29,443.37 ; R6.1@2238.85,434.49 cw(c2260.29,413.05) 2260.29,443.37 ; R6.1@2238.85,434.49 cw(c2260.29,413.05) 2260.29,443.37 ; R6.1@2238.85,434.49 cw(c2260.29,413.05) 2260.29,443.37 ; R6.1@2238.85,434.49 cw(c2260.29,413.05) 2260.29,443.37 ; R6.1@2238.85,452.25 ccw(c2260.29,473.69) 2260.29,443.37 ; R6.1@2238.85,452.25 ccw(c2260.29,473.69) 2260.29,443.37 ; R6.1@2238.85,452.25 ccw(c2260.29,473.69) 2260.29,443.37 ; R6.1@2238.85,452.25 ccw(c2260.29,473.69) 2260.29,443.37 ; R6.1@2238.85,452.25 ccw(c2260.29,473.69) 2260.29,443.37 ; R6.1@2245.92,427.42 cw(c2284.43,388.91) 2284.43,443.37 ; R6.1@2245.92,427.42 cw(c2284.43,388.91) 2284.43,443.37 ; R6.1@2245.92,427.42 cw(c2284.43,388.91) 2284.43,443.37 ; R6.1@2245.92,427.42 cw(c2284.43,388.91) 2284.43,443.37 ; R6.1@2245.92,427.42 cw(c2284.43,388.91) 2284.43,443.37 ; R6.1@2245.92,459.32 ccw(c2284.43,497.83) 2284.43,443.37 ; R6.1@2245.92,459.32 ccw(c2284.43,497.83) 2284.43,443.37 ; R6.1@2245.92,459.32 ccw(c2284.43,497.83) 2284.43,443.37 ; R6.1@2245.92,459.32 ccw(c2284.43,497.83) 2284.43,443.37 ; R6.1@2245.92,459.32 ccw(c2284.43,497.83) 2284.43,443.37 ; U1.11@2339.49,1711.02 ccw(c2362.45,1711.02) 2346.21,1694.79 ; U1.11@2339.49,1711.02 ccw(c2362.45,1711.02) 2346.21,1694.79 ; U1.11@2339.49,1711.02 ccw(c2362.45,1711.02) 2346.21,1694.79 ; U1.11@2339.49,1711.02 ccw(c2362.45,1711.02) 2346.21,1694.79 ; U1.11@2339.49,1711.02 ccw(c2362.45,1711.02) 2346.21,1694.79
MSH: C23.1 C25.1 U4.21 | length 1887.6
  Top Layer w10: U4.21@977.23,1988.16 1111.16,1988.16 1140,2017 1140,2079 1156.37,2095.37 ; C23.1@1289,2095.37 C25.1@1192,2095.37 1156.37,2095.37 ; 1156.37,2095.37 cw(c1156.37,2081.54) C25.1@1169.17,2086.8 ; 1156.37,2095.37 ccw(c1156.37,2109.2) C25.1@1169.17,2103.94 ; 1156.37,2095.37 cw(c1156.37,2081.54) C25.1@1169.17,2086.8 ; 1156.37,2095.37 ccw(c1156.37,2109.2) C25.1@1169.17,2103.94 ; 1156.37,2095.37 cw(c1156.37,2081.54) C25.1@1169.17,2086.8 ; 1156.37,2095.37 ccw(c1156.37,2109.2) C25.1@1169.17,2103.94 ; 1156.37,2095.37 cw(c1156.37,2081.54) C25.1@1169.17,2086.8 ; 1156.37,2095.37 ccw(c1156.37,2109.2) C25.1@1169.17,2103.94 ; 1156.37,2095.37 cw(c1156.37,2081.54) C25.1@1169.17,2086.8 ; 1156.37,2095.37 ccw(c1156.37,2109.2) C25.1@1169.17,2103.94 ; C25.1@1202.85,2086.49 cw(c1224.29,2065.05) 1224.29,2095.37 ; C25.1@1202.85,2086.49 cw(c1224.29,2065.05) 1224.29,2095.37 ; C25.1@1202.85,2086.49 cw(c1224.29,2065.05) 1224.29,2095.37 ; C25.1@1202.85,2086.49 cw(c1224.29,2065.05) 1224.29,2095.37 ; C25.1@1202.85,2086.49 cw(c1224.29,2065.05) 1224.29,2095.37 ; C25.1@1202.85,2104.25 ccw(c1224.29,2125.69) 1224.29,2095.37 ; C25.1@1202.85,2104.25 ccw(c1224.29,2125.69) 1224.29,2095.37 ; C25.1@1202.85,2104.25 ccw(c1224.29,2125.69) 1224.29,2095.37 ; C25.1@1202.85,2104.25 ccw(c1224.29,2125.69) 1224.29,2095.37 ; C25.1@1202.85,2104.25 ccw(c1224.29,2125.69) 1224.29,2095.37 ; C25.1@1209.92,2079.42 cw(c1248.43,2040.91) 1248.43,2095.37 ; C25.1@1209.92,2079.42 cw(c1248.43,2040.91) 1248.43,2095.37 ; C25.1@1209.92,2079.42 cw(c1248.43,2040.91) 1248.43,2095.37 ; C25.1@1209.92,2079.42 cw(c1248.43,2040.91) 1248.43,2095.37 ; C25.1@1209.92,2079.42 cw(c1248.43,2040.91) 1248.43,2095.37 ; C25.1@1209.92,2111.32 ccw(c1248.43,2149.83) 1248.43,2095.37 ; C25.1@1209.92,2111.32 ccw(c1248.43,2149.83) 1248.43,2095.37 ; C25.1@1209.92,2111.32 ccw(c1248.43,2149.83) 1248.43,2095.37 ; C25.1@1209.92,2111.32 ccw(c1248.43,2149.83) 1248.43,2095.37 ; C25.1@1209.92,2111.32 ccw(c1248.43,2149.83) 1248.43,2095.37 ; 1232.57,2095.37 cw(c1232.57,2040.91) C23.1@1271.08,2079.42 ; 1232.57,2095.37 ccw(c1232.57,2149.83) C23.1@1271.08,2111.32 ; 1232.57,2095.37 cw(c1232.57,2040.91) C23.1@1271.08,2079.42 ; 1232.57,2095.37 ccw(c1232.57,2149.83) C23.1@1271.08,2111.32 ; 1232.57,2095.37 cw(c1232.57,2040.91) C23.1@1271.08,2079.42 ; 1232.57,2095.37 ccw(c1232.57,2149.83) C23.1@1271.08,2111.32 ; 1232.57,2095.37 cw(c1232.57,2040.91) C23.1@1271.08,2079.42 ; 1232.57,2095.37 ccw(c1232.57,2149.83) C23.1@1271.08,2111.32 ; 1232.57,2095.37 cw(c1232.57,2040.91) C23.1@1271.08,2079.42 ; 1232.57,2095.37 ccw(c1232.57,2149.83) C23.1@1271.08,2111.32 ; 1256.71,2095.37 cw(c1256.71,2065.05) C23.1@1278.15,2086.49 ; 1256.71,2095.37 ccw(c1256.71,2125.69) C23.1@1278.15,2104.25 ; 1256.71,2095.37 cw(c1256.71,2065.05) C23.1@1278.15,2086.49 ; 1256.71,2095.37 ccw(c1256.71,2125.69) C23.1@1278.15,2104.25 ; 1256.71,2095.37 cw(c1256.71,2065.05) C23.1@1278.15,2086.49 ; 1256.71,2095.37 ccw(c1256.71,2125.69) C23.1@1278.15,2104.25 ; 1256.71,2095.37 cw(c1256.71,2065.05) C23.1@1278.15,2086.49 ; 1256.71,2095.37 ccw(c1256.71,2125.69) C23.1@1278.15,2104.25 ; 1256.71,2095.37 cw(c1256.71,2065.05) C23.1@1278.15,2086.49 ; 1256.71,2095.37 ccw(c1256.71,2125.69) C23.1@1278.15,2104.25
NetC5_1: C5.1 U3.17 | length 913.8
  Bottom Layer w10: U3.17@2601.38,2596.46 2601.38,2660.38 2653.6,2712.6 C5.1@2763.78,2712.6 ; 2709.32,2712.6 cw(c2709.32,2658.14) C5.1@2747.83,2696.65 ; 2709.32,2712.6 ccw(c2709.32,2767.06) C5.1@2747.83,2728.55 ; 2709.32,2712.6 cw(c2709.32,2658.14) C5.1@2747.83,2696.65 ; 2709.32,2712.6 ccw(c2709.32,2767.06) C5.1@2747.83,2728.55 ; 2709.32,2712.6 cw(c2709.32,2658.14) C5.1@2747.83,2696.65 ; 2709.32,2712.6 ccw(c2709.32,2767.06) C5.1@2747.83,2728.55 ; 2709.32,2712.6 cw(c2709.32,2658.14) C5.1@2747.83,2696.65 ; 2709.32,2712.6 ccw(c2709.32,2767.06) C5.1@2747.83,2728.55 ; 2709.32,2712.6 cw(c2709.32,2658.14) C5.1@2747.83,2696.65 ; 2709.32,2712.6 ccw(c2709.32,2767.06) C5.1@2747.83,2728.55 ; 2733.46,2712.6 cw(c2733.46,2682.28) C5.1@2754.9,2703.72 ; 2733.46,2712.6 ccw(c2733.46,2742.92) C5.1@2754.9,2721.48 ; 2733.46,2712.6 cw(c2733.46,2682.28) C5.1@2754.9,2703.72 ; 2733.46,2712.6 ccw(c2733.46,2742.92) C5.1@2754.9,2721.48 ; 2733.46,2712.6 cw(c2733.46,2682.28) C5.1@2754.9,2703.72 ; 2733.46,2712.6 ccw(c2733.46,2742.92) C5.1@2754.9,2721.48 ; 2733.46,2712.6 cw(c2733.46,2682.28) C5.1@2754.9,2703.72 ; 2733.46,2712.6 ccw(c2733.46,2742.92) C5.1@2754.9,2721.48 ; 2733.46,2712.6 cw(c2733.46,2682.28) C5.1@2754.9,2703.72 ; 2733.46,2712.6 ccw(c2733.46,2742.92) C5.1@2754.9,2721.48
NetC17_1: C17.1 U4.23 | length 401.1
  Top Layer w10: U4.23@977.23,2027.53 1015.53,2027.53 1035,2047 1035,2109 1046.37,2120.37 ; C17.1@1086,2120.37 1046.37,2120.37 ; 1046.37,2120.37 cw(c1046.37,2100.22) C17.1@1064.14,2109.73 ; 1046.37,2120.37 ccw(c1046.37,2140.52) C17.1@1064.14,2131.01 ; 1046.37,2120.37 cw(c1046.37,2100.22) C17.1@1064.14,2109.73 ; 1046.37,2120.37 ccw(c1046.37,2140.52) C17.1@1064.14,2131.01 ; 1046.37,2120.37 cw(c1046.37,2100.22) C17.1@1064.14,2109.73 ; 1046.37,2120.37 ccw(c1046.37,2140.52) C17.1@1064.14,2131.01 ; 1046.37,2120.37 cw(c1046.37,2100.22) C17.1@1064.14,2109.73 ; 1046.37,2120.37 ccw(c1046.37,2140.52) C17.1@1064.14,2131.01 ; 1046.37,2120.37 cw(c1046.37,2100.22) C17.1@1064.14,2109.73 ; 1046.37,2120.37 ccw(c1046.37,2140.52) C17.1@1064.14,2131.01
NetC17_2: C17.2 U4.22 | length 608.6
  Top Layer w10: U4.22@977.23,2007.84 1037.84,2007.84 ; C17.2@1086,2041.63 1071.63,2041.63 1037.84,2007.84 ; 1037.84,2007.84 cw(c1069.06,1976.63) C17.2@1078.97,2019.65 ; 1037.84,2007.84 cw(c1069.06,1976.63) C17.2@1078.97,2019.65 ; 1037.84,2007.84 cw(c1069.06,1976.63) C17.2@1078.97,2019.65 ; 1037.84,2007.84 cw(c1069.06,1976.63) C17.2@1078.97,2019.65 ; 1037.84,2007.84 cw(c1069.06,1976.63) C17.2@1078.97,2019.65 ; 1050.61,2020.61 cw(c1073.84,1997.38) C17.2@1081.21,2029.39 ; 1050.61,2020.61 cw(c1073.84,1997.38) C17.2@1081.21,2029.39 ; 1050.61,2020.61 cw(c1073.84,1997.38) C17.2@1081.21,2029.39 ; 1050.61,2020.61 cw(c1073.84,1997.38) C17.2@1081.21,2029.39 ; 1050.61,2020.61 cw(c1073.84,1997.38) C17.2@1081.21,2029.39 ; 1054.29,2024.29 ccw(c1036.95,2041.63) C17.2@1061.47,2041.63 ; 1054.29,2024.29 ccw(c1036.95,2041.63) C17.2@1061.47,2041.63 ; 1054.29,2024.29 ccw(c1036.95,2041.63) C17.2@1061.47,2041.63 ; 1054.29,2024.29 ccw(c1036.95,2041.63) C17.2@1061.47,2041.63 ; 1054.29,2024.29 ccw(c1036.95,2041.63) C17.2@1061.47,2041.63
NetD1_2: D1.2 R4.2 | length 118.1
  Top Layer w10: R4.2@1629.92,3000 D1.2@1748.03,3000
NetD2_2: D2.2 R5.2 | length 1199.7
  Top Layer w10: D2.2@1893,188.92 R5.2@1893,369.63 ; R5.2@1877.05,353.68 cw(c1838.54,315.17) 1893,315.17 ; R5.2@1877.05,353.68 cw(c1838.54,315.17) 1893,315.17 ; R5.2@1877.05,353.68 cw(c1838.54,315.17) 1893,315.17 ; R5.2@1877.05,353.68 cw(c1838.54,315.17) 1893,315.17 ; R5.2@1877.05,353.68 cw(c1838.54,315.17) 1893,315.17 ; D2.2@1878.89,201.14 ccw(c1844.82,235.21) 1893,235.21 ; D2.2@1878.89,201.14 ccw(c1844.82,235.21) 1893,235.21 ; D2.2@1878.89,201.14 ccw(c1844.82,235.21) 1893,235.21 ; D2.2@1878.89,201.14 ccw(c1844.82,235.21) 1893,235.21 ; D2.2@1878.89,201.14 ccw(c1844.82,235.21) 1893,235.21 ; R5.2@1884.12,360.75 cw(c1862.68,339.31) 1893,339.31 ; R5.2@1884.12,360.75 cw(c1862.68,339.31) 1893,339.31 ; R5.2@1884.12,360.75 cw(c1862.68,339.31) 1893,339.31 ; R5.2@1884.12,360.75 cw(c1862.68,339.31) 1893,339.31 ; R5.2@1884.12,360.75 cw(c1862.68,339.31) 1893,339.31 ; 1893,230.65 ccw(c1934.73,230.65) D2.2@1905.22,201.14 ; 1893,230.65 ccw(c1934.73,230.65) D2.2@1905.22,201.14 ; 1893,230.65 ccw(c1934.73,230.65) D2.2@1905.22,201.14 ; 1893,230.65 ccw(c1934.73,230.65) D2.2@1905.22,201.14 ; 1893,230.65 ccw(c1934.73,230.65) D2.2@1905.22,201.14 ; 1893,315.17 cw(c1947.46,315.17) R5.2@1908.95,353.68 ; 1893,315.17 cw(c1947.46,315.17) R5.2@1908.95,353.68 ; 1893,315.17 cw(c1947.46,315.17) R5.2@1908.95,353.68 ; 1893,315.17 cw(c1947.46,315.17) R5.2@1908.95,353.68 ; 1893,315.17 cw(c1947.46,315.17) R5.2@1908.95,353.68 ; 1893,339.31 cw(c1923.32,339.31) R5.2@1901.88,360.75 ; 1893,339.31 cw(c1923.32,339.31) R5.2@1901.88,360.75 ; 1893,339.31 cw(c1923.32,339.31) R5.2@1901.88,360.75 ; 1893,339.31 cw(c1923.32,339.31) R5.2@1901.88,360.75 ; 1893,339.31 cw(c1923.32,339.31) R5.2@1901.88,360.75
NetD3_2: D3.2 R6.2 | length 1194.3
  Top Layer w10: D3.2@2226.7,187.98 R6.2@2226.7,363.33 ; R6.2@2210.08,348.68 cw(c2169.96,308.55) 2226.7,308.55 ; R6.2@2210.08,348.68 cw(c2169.96,308.55) 2226.7,308.55 ; R6.2@2210.08,348.68 cw(c2169.96,308.55) 2226.7,308.55 ; R6.2@2210.08,348.68 cw(c2169.96,308.55) 2226.7,308.55 ; R6.2@2210.08,348.68 cw(c2169.96,308.55) 2226.7,308.55 ; D3.2@2213.53,201.14 ccw(c2181.74,232.93) 2226.7,232.93 ; D3.2@2213.53,201.14 ccw(c2181.74,232.93) 2226.7,232.93 ; D3.2@2213.53,201.14 ccw(c2181.74,232.93) 2226.7,232.93 ; D3.2@2213.53,201.14 ccw(c2181.74,232.93) 2226.7,232.93 ; D3.2@2213.53,201.14 ccw(c2181.74,232.93) 2226.7,232.93 ; R6.2@2217.15,355.75 cw(c2194.1,332.7) 2226.7,332.7 ; R6.2@2217.15,355.75 cw(c2194.1,332.7) 2226.7,332.7 ; R6.2@2217.15,355.75 cw(c2194.1,332.7) 2226.7,332.7 ; R6.2@2217.15,355.75 cw(c2194.1,332.7) 2226.7,332.7 ; R6.2@2217.15,355.75 cw(c2194.1,332.7) 2226.7,332.7 ; 2226.7,232.93 ccw(c2271.66,232.93) D3.2@2239.87,201.14 ; 2226.7,232.93 ccw(c2271.66,232.93) D3.2@2239.87,201.14 ; 2226.7,232.93 ccw(c2271.66,232.93) D3.2@2239.87,201.14 ; 2226.7,232.93 ccw(c2271.66,232.93) D3.2@2239.87,201.14 ; 2226.7,232.93 ccw(c2271.66,232.93) D3.2@2239.87,201.14 ; 2226.7,311.78 cw(c2278.88,311.78) R6.2@2241.98,348.68 ; 2226.7,311.78 cw(c2278.88,311.78) R6.2@2241.98,348.68 ; 2226.7,311.78 cw(c2278.88,311.78) R6.2@2241.98,348.68 ; 2226.7,311.78 cw(c2278.88,311.78) R6.2@2241.98,348.68 ; 2226.7,311.78 cw(c2278.88,311.78) R6.2@2241.98,348.68 ; 2226.7,335.92 cw(c2254.74,335.92) R6.2@2234.91,355.75 ; 2226.7,335.92 cw(c2254.74,335.92) R6.2@2234.91,355.75 ; 2226.7,335.92 cw(c2254.74,335.92) R6.2@2234.91,355.75 ; 2226.7,335.92 cw(c2254.74,335.92) R6.2@2234.91,355.75 ; 2226.7,335.92 cw(c2254.74,335.92) R6.2@2234.91,355.75
NetD4_1: D4.1 R2.1 | length 1417.4
  Top Layer w10: R2.1@2649,2271.37 2650,2272.37 D4.1@2650,2356.63 ; D4.1@2634.05,2340.68 cw(c2595.54,2302.17) 2650,2302.17 ; D4.1@2634.05,2340.68 cw(c2595.54,2302.17) 2650,2302.17 ; D4.1@2634.05,2340.68 cw(c2595.54,2302.17) 2650,2302.17 ; D4.1@2634.05,2340.68 cw(c2595.54,2302.17) 2650,2302.17 ; D4.1@2634.05,2340.68 cw(c2595.54,2302.17) 2650,2302.17 ; R2.1@2635.02,2287.32 ccw(c2598.84,2323.49) 2650,2323.49 ; R2.1@2635.02,2287.32 ccw(c2598.84,2323.49) 2650,2323.49 ; R2.1@2635.02,2287.32 ccw(c2598.84,2323.49) 2650,2323.49 ; R2.1@2635.02,2287.32 ccw(c2598.84,2323.49) 2650,2323.49 ; R2.1@2635.02,2287.32 ccw(c2598.84,2323.49) 2650,2323.49 ; D4.1@2641.12,2347.75 cw(c2619.68,2326.31) 2650,2326.31 ; D4.1@2641.12,2347.75 cw(c2619.68,2326.31) 2650,2326.31 ; D4.1@2641.12,2347.75 cw(c2619.68,2326.31) 2650,2326.31 ; D4.1@2641.12,2347.75 cw(c2619.68,2326.31) 2650,2326.31 ; D4.1@2641.12,2347.75 cw(c2619.68,2326.31) 2650,2326.31 ; R2.1@2642.09,2280.25 ccw(c2622.99,2299.35) 2650,2299.35 ; R2.1@2642.09,2280.25 ccw(c2622.99,2299.35) 2650,2299.35 ; R2.1@2642.09,2280.25 ccw(c2622.99,2299.35) 2650,2299.35 ; R2.1@2642.09,2280.25 ccw(c2622.99,2299.35) 2650,2299.35 ; R2.1@2642.09,2280.25 ccw(c2622.99,2299.35) 2650,2299.35 ; 2650,2302.17 cw(c2704.46,2302.17) D4.1@2665.95,2340.68 ; 2650,2302.17 cw(c2704.46,2302.17) D4.1@2665.95,2340.68 ; 2650,2302.17 cw(c2704.46,2302.17) D4.1@2665.95,2340.68 ; 2650,2302.17 cw(c2704.46,2302.17) D4.1@2665.95,2340.68 ; 2650,2302.17 cw(c2704.46,2302.17) D4.1@2665.95,2340.68 ; 2650,2304.03 ccw(c2683.63,2304.03) R2.1@2659.85,2280.25 ; 2650,2304.03 ccw(c2683.63,2304.03) R2.1@2659.85,2280.25 ; 2650,2304.03 ccw(c2683.63,2304.03) R2.1@2659.85,2280.25 ; 2650,2304.03 ccw(c2683.63,2304.03) R2.1@2659.85,2280.25 ; 2650,2304.03 ccw(c2683.63,2304.03) R2.1@2659.85,2280.25 ; 2650,2326.31 cw(c2680.32,2326.31) D4.1@2658.88,2347.75 ; 2650,2326.31 cw(c2680.32,2326.31) D4.1@2658.88,2347.75 ; 2650,2326.31 cw(c2680.32,2326.31) D4.1@2658.88,2347.75 ; 2650,2326.31 cw(c2680.32,2326.31) D4.1@2658.88,2347.75 ; 2650,2326.31 cw(c2680.32,2326.31) D4.1@2658.88,2347.75 ; 2650,2328.17 ccw(c2707.77,2328.17) R2.1@2666.92,2287.32 ; 2650,2328.17 ccw(c2707.77,2328.17) R2.1@2666.92,2287.32 ; 2650,2328.17 ccw(c2707.77,2328.17) R2.1@2666.92,2287.32 ; 2650,2328.17 ccw(c2707.77,2328.17) R2.1@2666.92,2287.32 ; 2650,2328.17 ccw(c2707.77,2328.17) R2.1@2666.92,2287.32
NetD4_2: D4.2 U3.23 | length 2707.2
  Top Layer w10: D4.2@2650,2435.37 v2(2650,2496) ; D4.2@2634.05,2451.32 ccw(c2595.54,2489.83) v2@2650,2489.83 ; D4.2@2634.05,2451.32 ccw(c2595.54,2489.83) v2@2650,2489.83 ; D4.2@2634.05,2451.32 ccw(c2595.54,2489.83) v2@2650,2489.83 ; D4.2@2634.05,2451.32 ccw(c2595.54,2489.83) v2@2650,2489.83 ; D4.2@2634.05,2451.32 ccw(c2595.54,2489.83) v2@2650,2489.83 ; v2@2639.56,2489.12 cw(c2614.94,2472.9) 2643.42,2465.27 ; v2@2639.56,2489.12 cw(c2614.94,2472.9) 2643.42,2465.27 ; v2@2639.56,2489.12 cw(c2614.94,2472.9) 2643.42,2465.27 ; v2@2639.56,2489.12 cw(c2614.94,2472.9) 2643.42,2465.27 ; v2@2639.56,2489.12 cw(c2614.94,2472.9) 2643.42,2465.27 ; v2@2639.56,2489.12 cw(c2614.94,2472.9) 2643.42,2465.27 ; v2@2639.56,2489.12 cw(c2614.94,2472.9) 2643.42,2465.27 ; v2@2639.56,2489.12 cw(c2614.94,2472.9) 2643.42,2465.27 ; v2@2639.56,2489.12 cw(c2614.94,2472.9) 2643.42,2465.27 ; v2@2639.56,2489.12 cw(c2614.94,2472.9) 2643.42,2465.27 ; v2@2639.56,2489.12 cw(c2614.94,2472.9) 2643.42,2465.27 ; v2@2639.56,2489.12 cw(c2614.94,2472.9) 2643.42,2465.27 ; v2@2639.56,2489.12 cw(c2614.94,2472.9) 2643.42,2465.27 ; v2@2639.56,2489.12 cw(c2614.94,2472.9) 2643.42,2465.27 ; v2@2639.56,2489.12 cw(c2614.94,2472.9) 2643.42,2465.27 ; D4.2@2641.12,2444.25 ccw(c2619.68,2465.69) 2650,2465.69 ; D4.2@2641.12,2444.25 ccw(c2619.68,2465.69) 2650,2465.69 ; D4.2@2641.12,2444.25 ccw(c2619.68,2465.69) 2650,2465.69 ; D4.2@2641.12,2444.25 ccw(c2619.68,2465.69) 2650,2465.69 ; D4.2@2641.12,2444.25 ccw(c2619.68,2465.69) 2650,2465.69 ; v2@2641.16,2487.16 cw(c2619.82,2465.82) 2650,2465.82 ; v2@2641.16,2487.16 cw(c2619.82,2465.82) 2650,2465.82 ; v2@2641.16,2487.16 cw(c2619.82,2465.82) 2650,2465.82 ; v2@2641.16,2487.16 cw(c2619.82,2465.82) 2650,2465.82 ; v2@2641.16,2487.16 cw(c2619.82,2465.82) 2650,2465.82 ; v2@2643.75,2485.17 cw(c2631.39,2463.76) 2655.27,2470.16 ; v2@2643.75,2485.17 cw(c2631.39,2463.76) 2655.27,2470.16 ; v2@2643.75,2485.17 cw(c2631.39,2463.76) 2655.27,2470.16 ; v2@2643.75,2485.17 cw(c2631.39,2463.76) 2655.27,2470.16 ; v2@2643.75,2485.17 cw(c2631.39,2463.76) 2655.27,2470.16 ; v2@2643.75,2485.17 cw(c2631.39,2463.76) 2655.27,2470.16 ; v2@2643.75,2485.17 cw(c2631.39,2463.76) 2655.27,2470.16 ; v2@2643.75,2485.17 cw(c2631.39,2463.76) 2655.27,2470.16 ; v2@2643.75,2485.17 cw(c2631.39,2463.76) 2655.27,2470.16 ; v2@2643.75,2485.17 cw(c2631.39,2463.76) 2655.27,2470.16 ; v2@2643.75,2485.17 cw(c2631.39,2463.76) 2655.27,2470.16 ; v2@2643.75,2485.17 cw(c2631.39,2463.76) 2655.27,2470.16 ; v2@2643.75,2485.17 cw(c2631.39,2463.76) 2655.27,2470.16 ; v2@2643.75,2485.17 cw(c2631.39,2463.76) 2655.27,2470.16 ; v2@2643.75,2485.17 cw(c2631.39,2463.76) 2655.27,2470.16 ; 2644.73,2470.16 cw(c2668.61,2463.76) v2@2656.25,2485.17 ; 2644.73,2470.16 cw(c2668.61,2463.76) v2@2656.25,2485.17 ; 2644.73,2470.16 cw(c2668.61,2463.76) v2@2656.25,2485.17 ; 2644.73,2470.16 cw(c2668.61,2463.76) v2@2656.25,2485.17 ; 2644.73,2470.16 cw(c2668.61,2463.76) v2@2656.25,2485.17 ; 2644.73,2470.16 cw(c2668.61,2463.76) v2@2656.25,2485.17 ; 2644.73,2470.16 cw(c2668.61,2463.76) v2@2656.25,2485.17 ; 2644.73,2470.16 cw(c2668.61,2463.76) v2@2656.25,2485.17 ; 2644.73,2470.16 cw(c2668.61,2463.76) v2@2656.25,2485.17 ; 2644.73,2470.16 cw(c2668.61,2463.76) v2@2656.25,2485.17 ; 2644.73,2470.16 cw(c2668.61,2463.76) v2@2656.25,2485.17 ; 2644.73,2470.16 cw(c2668.61,2463.76) v2@2656.25,2485.17 ; 2644.73,2470.16 cw(c2668.61,2463.76) v2@2656.25,2485.17 ; 2644.73,2470.16 cw(c2668.61,2463.76) v2@2656.25,2485.17 ; 2644.73,2470.16 cw(c2668.61,2463.76) v2@2656.25,2485.17 ; 2650,2465.69 ccw(c2680.32,2465.69) D4.2@2658.88,2444.25 ; 2650,2465.69 ccw(c2680.32,2465.69) D4.2@2658.88,2444.25 ; 2650,2465.69 ccw(c2680.32,2465.69) D4.2@2658.88,2444.25 ; 2650,2465.69 ccw(c2680.32,2465.69) D4.2@2658.88,2444.25 ; 2650,2465.69 ccw(c2680.32,2465.69) D4.2@2658.88,2444.25 ; 2650,2465.82 cw(c2680.18,2465.82) v2@2658.84,2487.16 ; 2650,2465.82 cw(c2680.18,2465.82) v2@2658.84,2487.16 ; 2650,2465.82 cw(c2680.18,2465.82) v2@2658.84,2487.16 ; 2650,2465.82 cw(c2680.18,2465.82) v2@2658.84,2487.16 ; 2650,2465.82 cw(c2680.18,2465.82) v2@2658.84,2487.16 ; v2@2650,2489.83 ccw(c2704.46,2489.83) D4.2@2665.95,2451.32 ; v2@2650,2489.83 ccw(c2704.46,2489.83) D4.2@2665.95,2451.32 ; v2@2650,2489.83 ccw(c2704.46,2489.83) D4.2@2665.95,2451.32 ; v2@2650,2489.83 ccw(c2704.46,2489.83) D4.2@2665.95,2451.32 ; v2@2650,2489.83 ccw(c2704.46,2489.83) D4.2@2665.95,2451.32 ; 2656.58,2465.27 cw(c2685.06,2472.9) v2@2660.44,2489.12 ; 2656.58,2465.27 cw(c2685.06,2472.9) v2@2660.44,2489.12 ; 2656.58,2465.27 cw(c2685.06,2472.9) v2@2660.44,2489.12 ; 2656.58,2465.27 cw(c2685.06,2472.9) v2@2660.44,2489.12 ; 2656.58,2465.27 cw(c2685.06,2472.9) v2@2660.44,2489.12 ; 2656.58,2465.27 cw(c2685.06,2472.9) v2@2660.44,2489.12 ; 2656.58,2465.27 cw(c2685.06,2472.9) v2@2660.44,2489.12 ; 2656.58,2465.27 cw(c2685.06,2472.9) v2@2660.44,2489.12 ; 2656.58,2465.27 cw(c2685.06,2472.9) v2@2660.44,2489.12 ; 2656.58,2465.27 cw(c2685.06,2472.9) v2@2660.44,2489.12 ; 2656.58,2465.27 cw(c2685.06,2472.9) v2@2660.44,2489.12 ; 2656.58,2465.27 cw(c2685.06,2472.9) v2@2660.44,2489.12 ; 2656.58,2465.27 cw(c2685.06,2472.9) v2@2660.44,2489.12 ; 2656.58,2465.27 cw(c2685.06,2472.9) v2@2660.44,2489.12 ; 2656.58,2465.27 cw(c2685.06,2472.9) v2@2660.44,2489.12
  Bottom Layer w10: v2(2650,2496) 2677,2523 2734,2523 2754.92,2543.92 U3.23@2754.92,2596.46 ; v2@2650,2508.5 ccw(c2650,2538.68) 2671.34,2517.34 ; v2@2650,2508.5 ccw(c2650,2538.68) 2671.34,2517.34 ; v2@2650,2508.5 ccw(c2650,2538.68) 2671.34,2517.34 ; v2@2650,2508.5 ccw(c2650,2538.68) 2671.34,2517.34 ; v2@2650,2508.5 ccw(c2650,2538.68) 2671.34,2517.34 ; v2@2662.5,2496 cw(c2692.68,2496) 2671.34,2517.34 ; v2@2662.5,2496 cw(c2692.68,2496) 2671.34,2517.34 ; v2@2662.5,2496 cw(c2692.68,2496) 2671.34,2517.34 ; v2@2662.5,2496 cw(c2692.68,2496) 2671.34,2517.34 ; v2@2662.5,2496 cw(c2692.68,2496) 2671.34,2517.34
NetD5_1: D5.1 R3.1 | length 1417.4
  Top Layer w10: R3.1@2540,2270.37 2540,2354.63 D5.1@2541,2355.63 ; D5.1@2523.08,2339.68 cw(c2482.23,2298.83) 2540,2298.83 ; D5.1@2523.08,2339.68 cw(c2482.23,2298.83) 2540,2298.83 ; D5.1@2523.08,2339.68 cw(c2482.23,2298.83) 2540,2298.83 ; D5.1@2523.08,2339.68 cw(c2482.23,2298.83) 2540,2298.83 ; D5.1@2523.08,2339.68 cw(c2482.23,2298.83) 2540,2298.83 ; R3.1@2524.05,2286.32 ccw(c2485.54,2324.83) 2540,2324.83 ; R3.1@2524.05,2286.32 ccw(c2485.54,2324.83) 2540,2324.83 ; R3.1@2524.05,2286.32 ccw(c2485.54,2324.83) 2540,2324.83 ; R3.1@2524.05,2286.32 ccw(c2485.54,2324.83) 2540,2324.83 ; R3.1@2524.05,2286.32 ccw(c2485.54,2324.83) 2540,2324.83 ; D5.1@2530.15,2346.75 cw(c2506.37,2322.97) 2540,2322.97 ; D5.1@2530.15,2346.75 cw(c2506.37,2322.97) 2540,2322.97 ; D5.1@2530.15,2346.75 cw(c2506.37,2322.97) 2540,2322.97 ; D5.1@2530.15,2346.75 cw(c2506.37,2322.97) 2540,2322.97 ; D5.1@2530.15,2346.75 cw(c2506.37,2322.97) 2540,2322.97 ; R3.1@2531.12,2279.25 ccw(c2509.68,2300.69) 2540,2300.69 ; R3.1@2531.12,2279.25 ccw(c2509.68,2300.69) 2540,2300.69 ; R3.1@2531.12,2279.25 ccw(c2509.68,2300.69) 2540,2300.69 ; R3.1@2531.12,2279.25 ccw(c2509.68,2300.69) 2540,2300.69 ; R3.1@2531.12,2279.25 ccw(c2509.68,2300.69) 2540,2300.69 ; 2540,2300.69 ccw(c2570.32,2300.69) R3.1@2548.88,2279.25 ; 2540,2300.69 ccw(c2570.32,2300.69) R3.1@2548.88,2279.25 ; 2540,2300.69 ccw(c2570.32,2300.69) R3.1@2548.88,2279.25 ; 2540,2300.69 ccw(c2570.32,2300.69) R3.1@2548.88,2279.25 ; 2540,2300.69 ccw(c2570.32,2300.69) R3.1@2548.88,2279.25 ; 2540,2303.51 cw(c2591.15,2303.51) D5.1@2554.98,2339.68 ; 2540,2303.51 cw(c2591.15,2303.51) D5.1@2554.98,2339.68 ; 2540,2303.51 cw(c2591.15,2303.51) D5.1@2554.98,2339.68 ; 2540,2303.51 cw(c2591.15,2303.51) D5.1@2554.98,2339.68 ; 2540,2303.51 cw(c2591.15,2303.51) D5.1@2554.98,2339.68 ; 2540,2324.83 ccw(c2594.46,2324.83) R3.1@2555.95,2286.32 ; 2540,2324.83 ccw(c2594.46,2324.83) R3.1@2555.95,2286.32 ; 2540,2324.83 ccw(c2594.46,2324.83) R3.1@2555.95,2286.32 ; 2540,2324.83 ccw(c2594.46,2324.83) R3.1@2555.95,2286.32 ; 2540,2324.83 ccw(c2594.46,2324.83) R3.1@2555.95,2286.32 ; 2540,2327.65 cw(c2567.01,2327.65) D5.1@2547.91,2346.75 ; 2540,2327.65 cw(c2567.01,2327.65) D5.1@2547.91,2346.75 ; 2540,2327.65 cw(c2567.01,2327.65) D5.1@2547.91,2346.75 ; 2540,2327.65 cw(c2567.01,2327.65) D5.1@2547.91,2346.75 ; 2540,2327.65 cw(c2567.01,2327.65) D5.1@2547.91,2346.75